# Allegro board Power_board_P1.brd
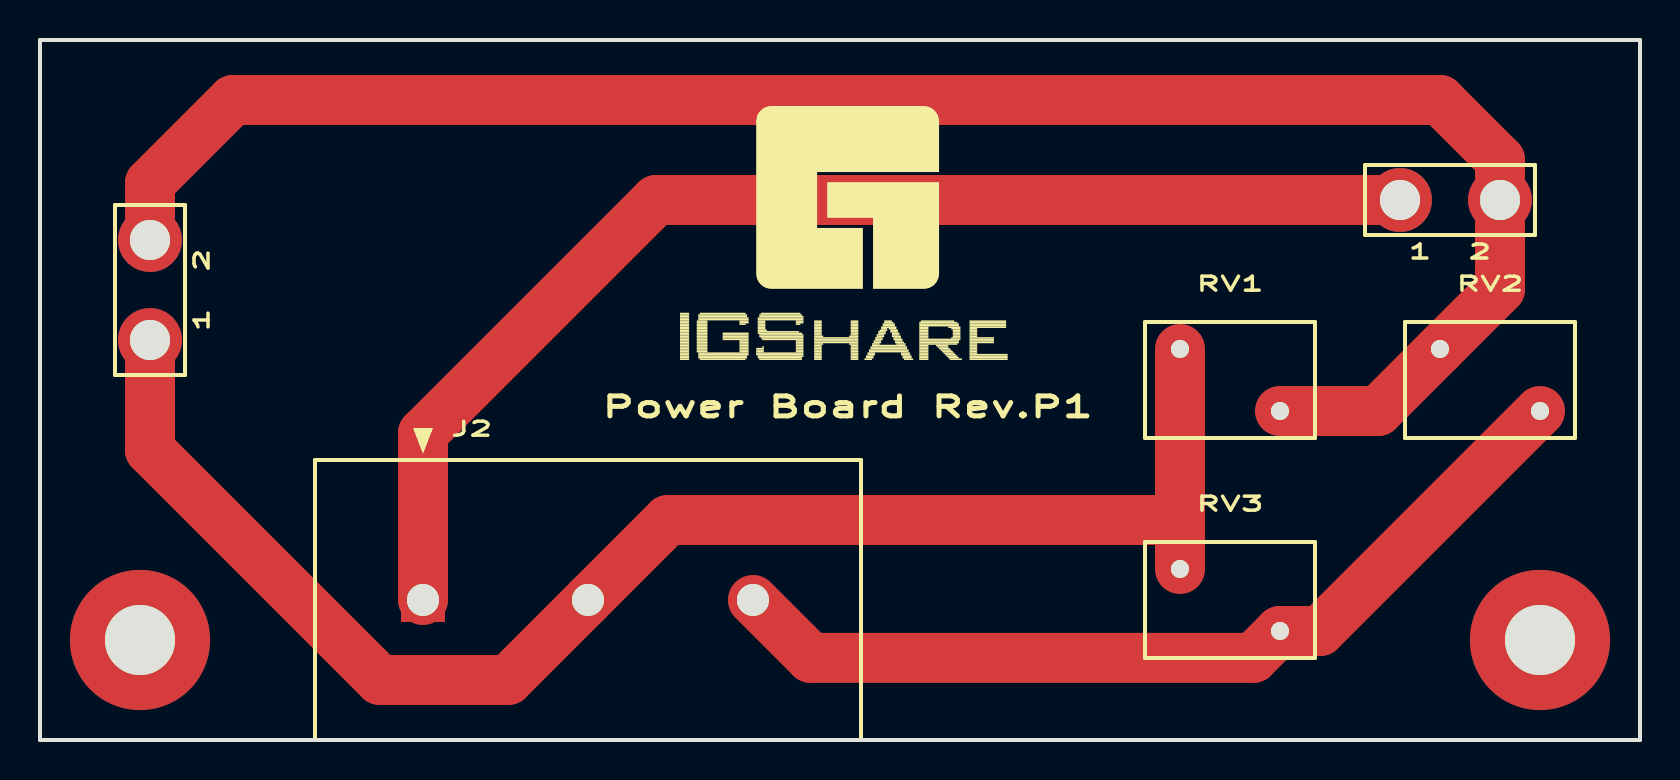
[diagram p0: board, top side]
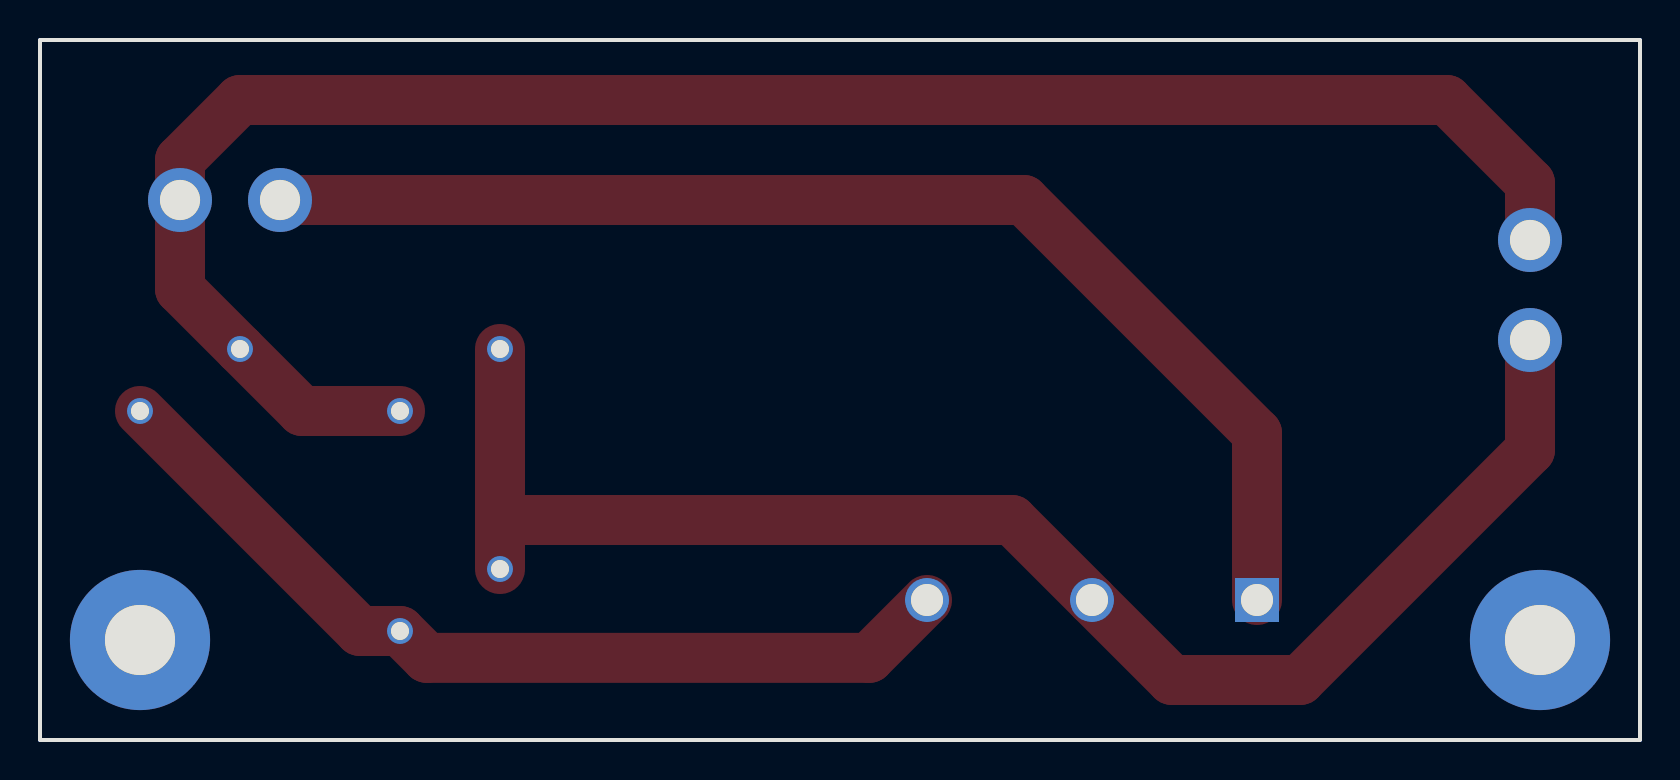
[diagram p1: board, bottom side, seen from below]

Outline 80 x 35 mm; copper layers: TOP, BOTTOM. Coordinates in mm from the lower left corner of the outline.
Outline path: 0,35 0,0 80,0 80,35 0,35

## Placement (name value [footprint] x y rotation side)
H1  PCB_HOLE  [MHOLE3_5]  75 5 0 top
H2  PCB_HOLE  [MHOLE3_5]  5 5 0 top
J1  -  [CON2]  70.5 27 0 top
J2  -  [OSTYK41203030]  27.4 7 0 top
J3  -  [CON2]  5.5 22.5 90 top
NOREF  -  []  0 0 0 top
NOREF#2  -  []  32 19 0 top
NOREF#3  -  []  13.97 -62.23 0 top
NOREF#4  -  []  19.05 -49.53 0 top
NOREF#5  -  []  0 0 90 top
RV1  -  [ERZ-V07D471]  59.5 18 0 top
RV2  -  [ERZ-V07D471]  72.5 18 0 top
RV3  -  [ERZ-V07D471]  59.5 7 0 top

## Library data of the parts
H1 H2 = _MHOLE3_5
J1 J3 = _CON2
J2 = _OSTYK41203030
RV1-RV3 = _ERZ-V07D471

## Footprints (pads in the part's own frame, mm; a bottom-side part is the same pattern mirrored in y, then rotated)
CON2
  round 3.2 hole 2.007: 1(-2.5,0) 2(2.5,0)
ERZ-V07D471
  round 1.3 hole 0.9: 1(-2.5,1.55) 2(2.5,-1.55)
MHOLE3_5
  round 7.01 hole 3.505: 1(0,0)
OSTYK41203030
  rect 2.2x2.2 hole 1.6: 1(-8.25,0)
  round 2.2 hole 1.6: 2(0,0) 3(8.25,0)

## Nets
GND: J2.3 RV2.2 RV3.2
FUSE: J1.1 J2.1
N: J2.2 J3.1 RV1.1 RV3.1
P: J1.2 J3.2 RV1.2 RV2.1

Pads without a net: H1 1; H2 1

## Routing (per net, layer and track width the routed paths; a pad name or vN(x,y) marks a point on that pad's centre or on a via; arc(x,y) is an arc through that point)
GND: length 45.7
  TOP w2.5: RV2.2 64,5.45 RV3.2 60.66,4.11 38.54,4.11 J2.3
FUSE: length 62
  TOP w2.5: J1.1 30.81,27 19.15,15.34 J2.1
N: length 76.1
  TOP w2.5: RV3.1 57,11 ; 57,11 RV1.1 ; 57,11 31.4,11 J2.2 23.4,3 17,3 5.5,14.5 J3.1
P: length 93.3
  TOP w2.5: J3.2 5.5,27.85 9.65,32 70,32 73,29 J1.2 73,22.55 RV2.1 66.9,16.45 RV1.2

## Text on the board
NCLEGEND-1-2: FIGURE | SIZE | 0.90 | 1.60 | 2.01 | 3.51 | DRILL CHART: TOP to BOTTOM | ALL UNITS ARE IN MILLIMETERS | PLATED | QTY | 6 | 3 | 4 | 2
